# EAGLE board activeElectrode_adapter (EAGLE 9.5.1)
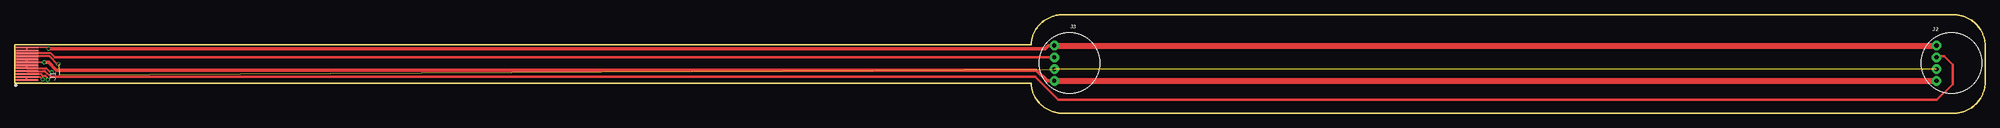
[diagram p0: board, top side]
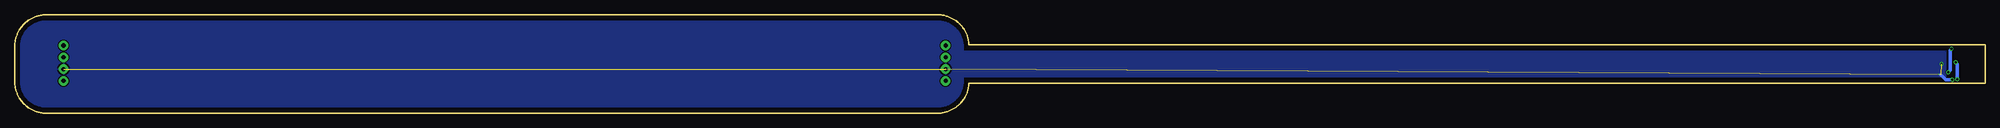
[diagram p1: board, bottom side, seen from below]

Size 334.15 x 16.7 mm. Coordinates in mm from the lower left corner, seen from the top.
Outline: 172.34,5.1 172.35,4.92 172.37,4.74 172.39,4.55 172.43,4.37 172.46,4.19 172.5,4.01 172.55,3.84 172.61,3.66 172.67,3.49 172.74,3.32 172.81,3.15 172.89,2.98 172.97,2.82 173.06,2.66 173.16,2.5 173.26,2.35 173.36,2.2 173.47,2.05 173.59,1.91 173.71,1.77 173.84,1.63 173.97,1.5 174.1,1.38 174.24,1.26 174.38,1.14 174.53,1.03 174.68,0.92 174.83,0.82 174.99,0.73 175.15,0.64 175.31,0.55 175.48,0.48 175.65,0.4 175.82,0.34 175.99,0.27 176.17,0.22 176.34,0.17 176.52,0.13 176.7,0.09 176.88,0.06 177.07,0.04 177.25,0.02 177.43,0.01 177.62,0 177.8,0 328.69,0 328.87,0 329.06,0.01 329.24,0.02 329.43,0.04 329.61,0.06 329.79,0.09 329.97,0.13 330.15,0.17 330.33,0.22 330.51,0.28 330.68,0.34 330.85,0.41 331.02,0.48 331.19,0.56 331.36,0.65 331.52,0.74 331.67,0.84 331.83,0.94 331.98,1.05 332.13,1.16 332.27,1.28 332.41,1.4 332.54,1.53 332.67,1.66 332.8,1.79 332.92,1.93 333.04,2.08 333.15,2.23 333.25,2.38 333.35,2.54 333.45,2.7 333.54,2.86 333.62,3.02 333.7,3.19 333.77,3.36 333.83,3.53 333.89,3.71 333.95,3.89 334,4.07 334.04,4.25 334.07,4.43 334.1,4.61 334.12,4.8 334.14,4.98 334.15,5.16 334.15,5.35 334.15,11.35 334.15,11.54 334.14,11.72 334.12,11.9 334.1,12.09 334.07,12.27 334.04,12.45 334,12.63 333.95,12.81 333.89,12.99 333.83,13.17 333.77,13.34 333.7,13.51 333.62,13.68 333.54,13.84 333.45,14 333.35,14.16 333.25,14.32 333.15,14.47 333.04,14.62 332.92,14.77 332.8,14.91 332.67,15.04 332.54,15.17 332.41,15.3 332.27,15.42 332.13,15.54 331.98,15.65 331.83,15.76 331.67,15.86 331.52,15.96 331.36,16.05 331.19,16.14 331.02,16.22 330.85,16.29 330.68,16.36 330.51,16.42 330.33,16.48 330.15,16.53 329.97,16.57 329.79,16.61 329.61,16.64 329.43,16.66 329.24,16.68 329.06,16.69 328.87,16.7 328.69,16.7 177.8,16.7 177.62,16.7 177.43,16.69 177.25,16.68 177.07,16.66 176.88,16.64 176.7,16.61 176.52,16.57 176.34,16.53 176.17,16.48 175.99,16.43 175.82,16.36 175.65,16.3 175.48,16.22 175.31,16.15 175.15,16.06 174.99,15.97 174.83,15.88 174.68,15.78 174.53,15.67 174.38,15.56 174.24,15.44 174.1,15.32 173.97,15.2 173.84,15.07 173.71,14.93 173.59,14.79 173.47,14.65 173.36,14.51 173.26,14.36 173.16,14.2 173.06,14.04 172.97,13.88 172.89,13.72 172.81,13.55 172.74,13.39 172.67,13.21 172.61,13.04 172.55,12.87 172.5,12.69 172.46,12.51 172.43,12.33 172.39,12.15 172.37,11.97 172.35,11.78 172.34,11.6 0,11.6 0,5.1 172.34,5.1
Copper layers (1*16): Top 0.035mm / dielectric 1.5mm / Bottom 0.035mm
Design rules "SparkFun-2-layer-PCBWay-LIMIT": minimum track width 6mil, minimum drill 0.3mm, track to track 6mil, track to pad 6mil, pad to pad 6mil, via to via 6mil, smd to smd 6mil, copper to edge 6mil, drill to drill 6mil, minimum pad ring 6mil, minimum via ring 6mil, stop-mask expansion 4mil, vias tented up to drill 25mil, thermal gap 10mil

## Footprints (pad centres in the part's own frame; a part is rotated, then mirrored left to right if it is on the bottom)
MOLEX_51296-1294_FLEX = smd 0.3 x 4: 1 0,2.025; 2 0.5,2.025; 3 1,2.025; 4 1.5,2.025; 5 2,2.025; 6 2.5,2.025; 7 3,2.025; 8 3.5,2.025; 9 4,2.025; 10 4.5,2.025; 11 5,2.025; 12 5.5,2.025
AE-4-PTH = drill 0.7 pad 1.6: 1 -3,0; 2 -1,0; 3 1,0; 4 3,0

## Placement (x,y rotation side)
J1  MOLEX_51296-1294_FLEX  [MOLEX_51296-1294_FLEX]  4.03,5.65 90 top
J2  [AE-4-PTH]  325.88,8.48 270 top
J3  [AE-4-PTH]  176.31,8.48 270 top

## Library data of the parts
J1 = Molex - 51296-1294
J2 J3 = SparkFun-Connectors

## Nets
7N: J1.4 J2.2
8N: J1.10 J3.2
AGND: J1.3 J1.9 J2.3 J3.3
AVDD: J1.1 J1.2 J1.7 J1.8 J2.4 J3.4
AVSS: J1.5 J1.6 J1.11 J1.12 J2.1 J3.1

## Tracks (layer width: path | path; a pad name or v marks a point on that pad's centre or on a via)
7N
  Top 0.25: 4.72,7.15 4.73,7.14
  Top 0.3: J1.4 4.72,7.15
  Top 0.406: 4.73,7.14 5.12,7.14 6.12,6.15 173.04,6.15 176.94,2.24 325.92,2.24 328.62,4.94 328.62,8.24 327.22,9.64 326.03,9.64
  Top 0.61: 326.03,9.64 J2.2
8N
  Top 0.25: J1.10
  Top 0.3: 6.79,9.48 6.12,10.14 J1.10
  Top 0.406: J3.2 6.79,9.48
AGND  (via drill 0.35)  (3 unrouted)
  Top 0.3: J1.9 5.9,9.65 7.21,8.34 | v5.6,5.71 5.6,5.96 5.18,6.37 4.7,6.37 4.42,6.65 J1.3
  Top 0.406: v7.43,8.34 7.21,8.34
  Bottom 0.61: v5.6,5.71 6.69,5.71 7.53,6.54
  pour Bottom (rank 2): 6.7,10.6 6.7,6.1 173.29,6.1 173.34,5.15 173.35,5 173.36,4.85 173.38,4.7 173.41,4.55 173.44,4.41 173.47,4.26 173.51,4.12 173.56,3.98 173.61,3.83 173.66,3.7 173.72,3.56 173.78,3.42 173.85,3.29 173.93,3.16 174,3.03 174.08,2.91 174.17,2.79 174.26,2.67 174.36,2.55 174.45,2.44 174.56,2.33 174.66,2.22 174.77,2.12 174.88,2.02 175,1.93 175.12,1.84 175.24,1.75 175.36,1.67 175.49,1.59 175.62,1.52 175.76,1.45 175.89,1.39 176.03,1.33 176.17,1.27 176.31,1.22 176.45,1.18 176.59,1.14 176.74,1.1 176.89,1.07 177.03,1.05 177.18,1.03 177.33,1.01 177.48,1 177.63,1 177.78,1 328.71,1 328.86,1 329.01,1 329.16,1.01 329.31,1.03 329.46,1.05 329.61,1.07 329.75,1.11 329.9,1.14 330.05,1.18 330.19,1.23 330.33,1.28 330.47,1.33 330.61,1.39 330.75,1.46 330.88,1.53 331.01,1.6 331.14,1.68 331.26,1.76 331.39,1.85 331.51,1.94 331.62,2.04 331.74,2.14 331.84,2.24 331.95,2.35 332.05,2.46 332.15,2.57 332.24,2.69 332.33,2.81 332.42,2.93 332.5,3.06 332.58,3.19 332.65,3.32 332.72,3.46 332.78,3.59 332.84,3.73 332.89,3.87 332.94,4.02 332.99,4.16 333.03,4.31 333.06,4.45 333.09,4.6 333.11,4.75 333.13,4.9 333.14,5.05 333.15,5.2 333.15,5.35 333.15,11.35 333.15,11.5 333.14,11.65 333.13,11.8 333.11,11.95 333.09,12.1 333.06,12.25 333.03,12.39 332.99,12.54 332.94,12.68 332.89,12.83 332.84,12.97 332.78,13.11 332.72,13.24 332.65,13.38 332.58,13.51 332.5,13.64 332.42,13.76 332.33,13.89 332.24,14.01 332.15,14.13 332.05,14.24 331.95,14.35 331.84,14.46 331.74,14.56 331.62,14.66 331.51,14.76 331.39,14.85 331.26,14.94 331.14,15.02 331.01,15.1 330.88,15.17 330.75,15.24 330.61,15.31 330.47,15.37 330.33,15.42 330.19,15.47 330.05,15.52 329.9,15.56 329.75,15.59 329.61,15.62 329.46,15.65 329.31,15.67 329.16,15.68 329.01,15.69 328.86,15.7 328.71,15.7 177.78,15.7 177.63,15.7 177.48,15.69 177.33,15.69 177.18,15.67 177.03,15.65 176.89,15.63 176.74,15.6 176.6,15.56 176.45,15.52 176.31,15.48 176.17,15.43 176.03,15.37 175.89,15.31 175.76,15.25 175.62,15.18 175.49,15.11 175.37,15.03 175.24,14.95 175.12,14.86 175,14.77 174.88,14.68 174.77,14.58 174.66,14.48 174.56,14.37 174.45,14.26 174.36,14.15 174.26,14.03 174.17,13.92 174.09,13.79 174,13.67 173.93,13.54 173.85,13.41 173.78,13.28 173.72,13.14 173.66,13.01 173.61,12.87 173.56,12.73 173.51,12.58 173.47,12.44 173.44,12.29 173.41,12.15 173.38,12 173.36,11.85 173.35,11.7 173.34,11.55 173.29,10.6
AVDD  (via drill 0.35)
  Top 0.25: J1.8 J1.7 v5.03,8.64
  Top 0.3: v4.73,5.74 4.62,5.74 4.22,6.15 J1.2 J1.1
  Top 0.61: J3.4 175.08,5.48 173.25,7.31 7.06,7.31 5.73,8.64 v5.03,8.64
  Top 1.016: J3.4 J2.4
  Bottom 0.61: v5.03,8.64 4.73,8.34 v4.73,5.74
AVSS  (via drill 0.35)
  Top 0.25: J1.11 J1.12 5.52,11.15 v5.73,10.94 | J1.6 J1.5
  Top 0.3: J1.5 5.33,7.65 6.01,6.98 v6.26,6.98 | v5.73,10.95 v5.73,10.94
  Top 0.61: v5.73,10.94 174.72,10.94 175.27,11.48 J3.1
  Top 1.016: J3.1 J2.1
  Bottom 0.61: v5.73,10.95 5.96,10.71 5.96,7.28 v6.26,6.98

## Text on the board
bStiffener: Stiffener BOT